# Altium PCB PCB GYRO REPETER.PcbDoc
Units mm, origin at the board's own origin, x right, y up, seen from the top; angles counter-clockwise.
Board outline 123.44 x 88.01 mm, 2 copper layers (Top Layer, Bottom Layer); 64 components, 61 nets, 238 pads, 15 vias.
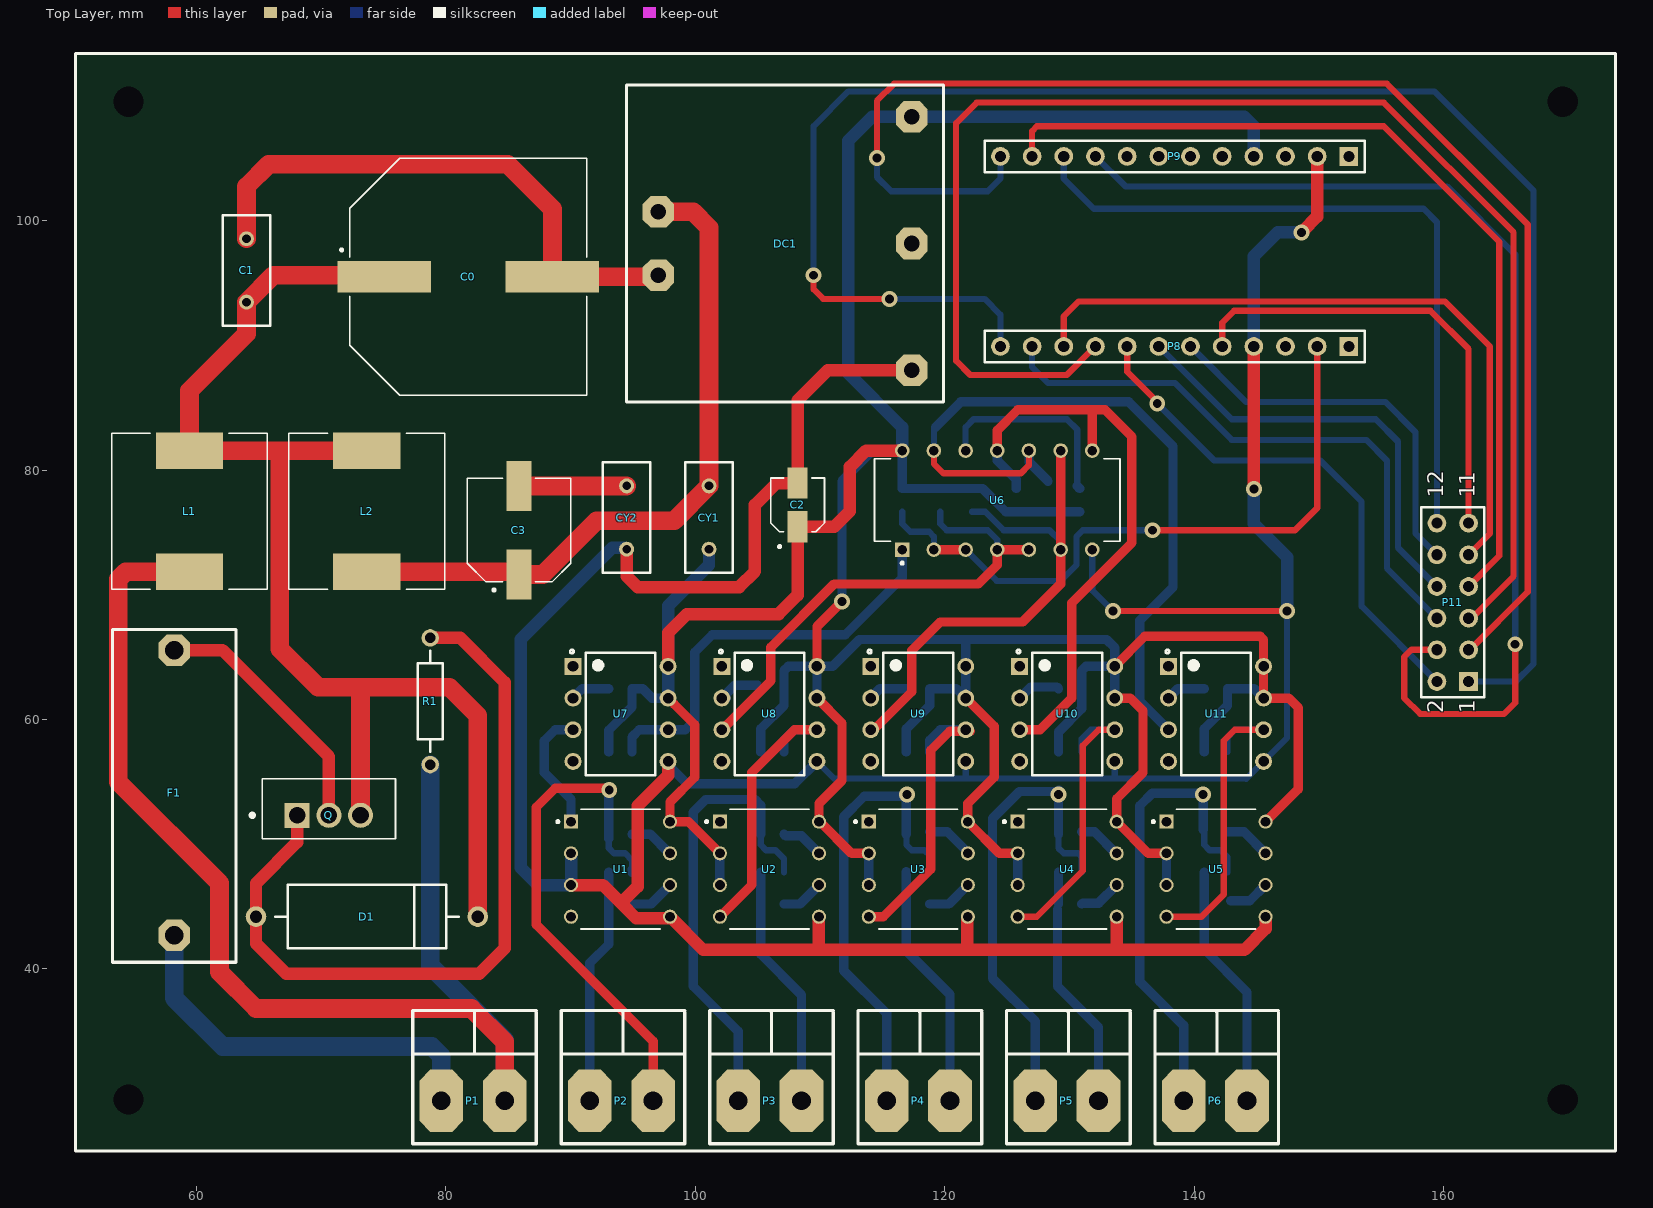
[diagram p0: Top Layer view]
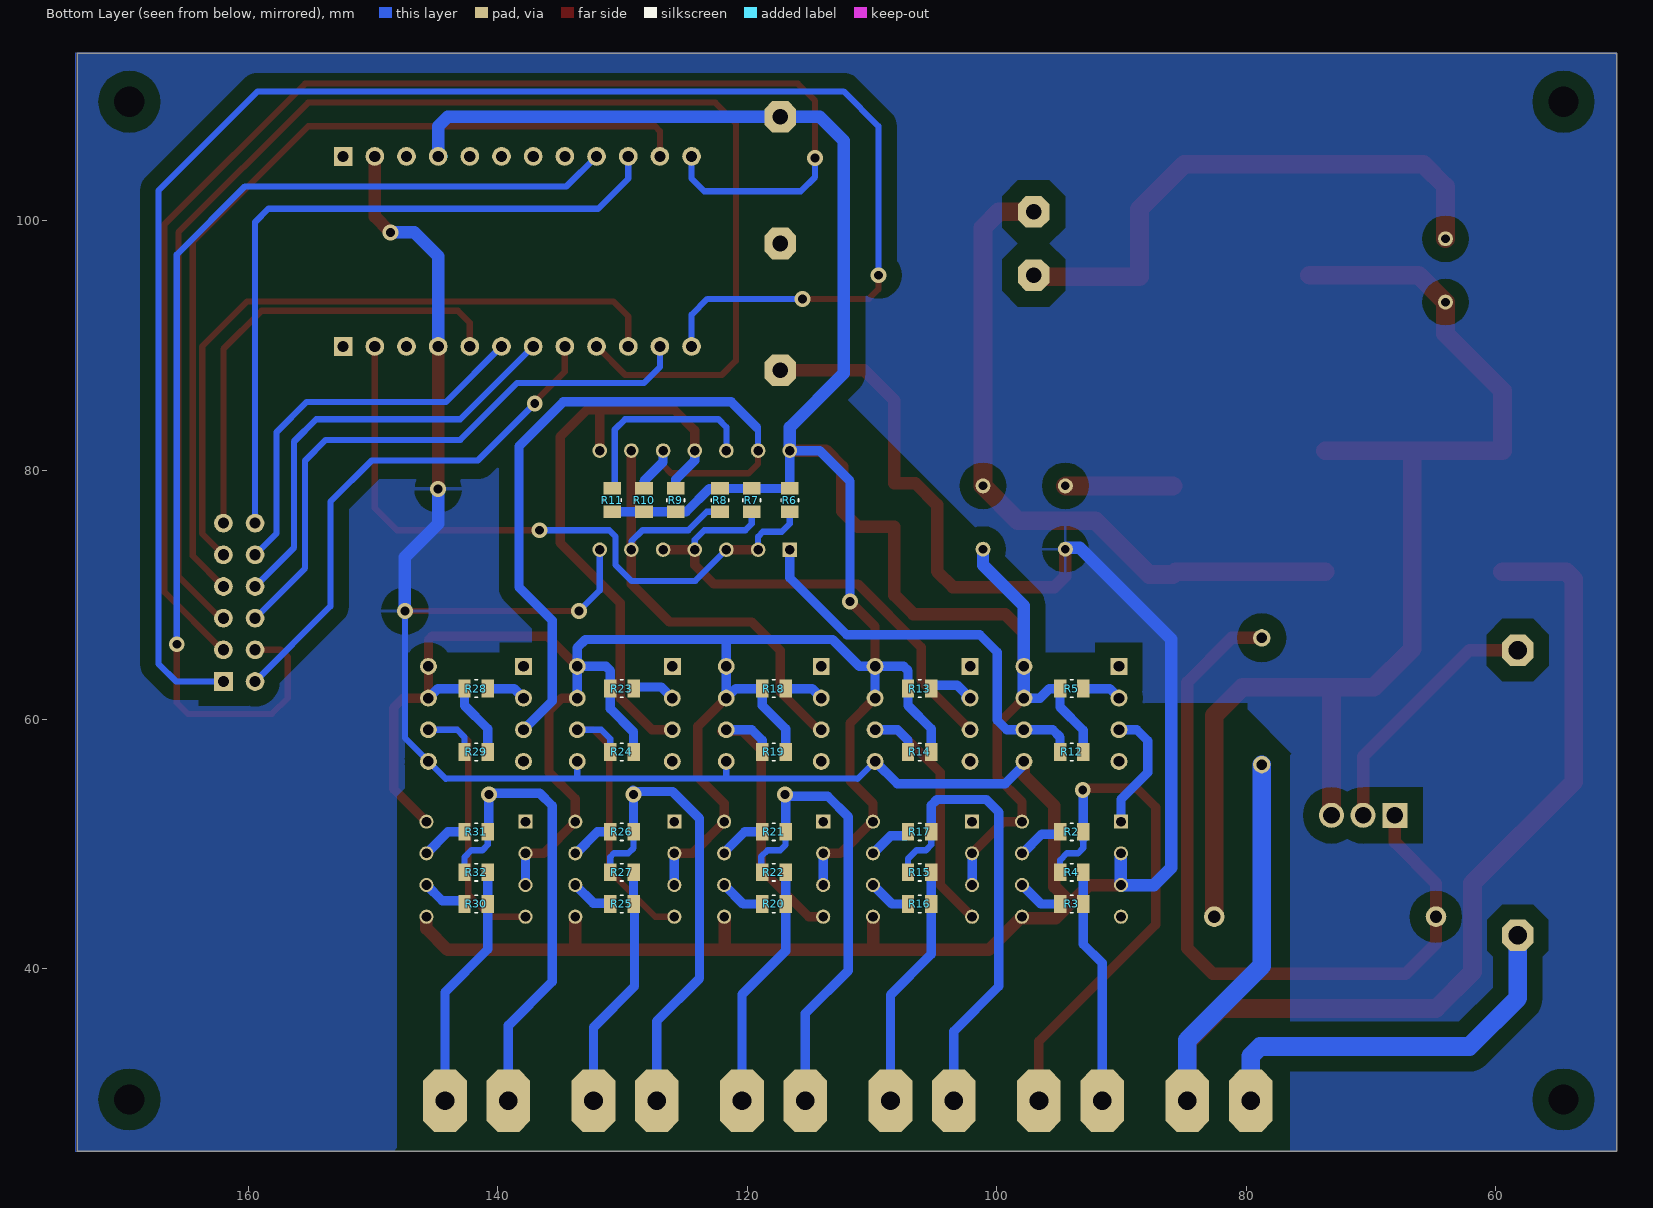
[diagram p1: Bottom Layer view, seen from below]

## Layer stack, top to bottom
Top Layer: signal copper 0.0356
Dielectric: dielectric 0.32, FR-4, Dk 4.8
Bottom Layer: signal copper 0.0356

## Board outline
50.292,25.4 173.736,25.4 173.736,113.411 50.292,113.411

## Design rules (kind name [scope] priority, off if disabled: settings)
Clearance Clearance_1 [All] p1: gap=0.254
Clearance [All] p2: gap=0.254
PolygonConnect [All] p1: connectstyle=Relief reliefconductorwidth=0.254 reliefentries=4 polygonreliefangle="90 Angle"
RoomDefinition "PCB GYRO REPETER" [InComponentClass('PCB GYRO REPETER')] p1: confinementstyle=ConfineIn formatcopy=TRUE lockcomponents=FALSE outline 336.931,5.461 0,5.461 0,179.324 336.931,179.324
RoutingVias [All] p1: holewidth=0.711 width=1.27 viastyle="Through Hole" minholewidth=0.711 minwidth=1.27 maxholewidth=0.711 maxwidth=1.27
SilkToSilkClearance [All] p1: silktosilkclearance=0.104
SilkscreenOverComponentPads [All] p1: minsilkscreentomaskgap=0.104
SolderMaskExpansion [All] p1: expansion=0.102
Width [All] p1: maxlimit=2 minlimit=0.254 preferedwidth=1
26 further rules are at their usual default settings.

## Components (designator, comment, footprint, x,y, rotation, side; value= is the part's Value field where it differs from the comment)
C0 "EEVTG1V102M" CAP_EEVTG1V102M 81.788,95.504 r0 top
C1 "Cap" RAD-0.2 64.008,96.012 r270 top
C2 "EEEFP1C100AR" CAP_EEEFP1C100AR 108.204,77.216 r90 top
C3 "EEEFT1V331AL" CAP_EEEFT1V331AL 85.852,75.184 r90 top
CY1 "Cap" RAD-0.2 101.092,76.2 r90 top
CY2 "Cap" RAD-0.2 94.488,76.2 r90 top
D1 "D Zener" DIODE-0.7 73.66,44.196 r0 top
DC1 "MORNSUN DC DC" "DC DC MORNSUN" 99.06,98.552 r0 top
F1 "FUSE-HOLDER" Fuse-Holder 46.228,50.8 r0 top
L1 "330uH" IND_SRR1240-101M 59.436,76.708 r90 top
L2 "SRR1240-101M" IND_SRR1240-101M 73.66,76.708 r90 top
P1 "PWR" Terminal-blok 6.6,97.5 r0 top
P2 "INPUT" Terminal-blok 18.505,97.5 r0 top
P3 "OUT-1" Terminal-blok 30.409,97.5 r0 top
P4 "OUT-2" Terminal-blok 42.314,97.5 r0 top
P5 "OUT-3" Terminal-blok 54.22,97.5 r0 top
P6 "OUT-4" Terminal-blok 66.124,97.5 r0 top
P8 "Header 12" HDR1X12 152.4,89.916 r180 top
P9 "Header 12" HDR1X12 152.4,105.156 r180 top
P11 "Header 6X2" HDR2X6 162,63.05 r90 top
Q "FQP47P06" TO254P1067X483X2286-3 68.072,52.324 r0 top
R1 "Res2" AXIAL-0.4 78.74,61.468 r90 top
R2 "1623401-1" RESC2012X65N 93.98,51 r0 bottom
R3 "1623401-1" RESC2012X65N 93.98,45.212 r0 bottom
R4 "1623401-1" RESC2012X65N 93.98,47.752 r180 bottom
R5 "1623401-1" RESC2012X65N 93.98,62.484 r0 bottom
R6 "1623401-1" RESC2012X65N 116.586,77.597 r90 bottom
R7 "1623401-1" RESC2012X65N 119.634,77.597 r90 bottom
R8 "1623401-1" RESC2012X65N 122.174,77.597 r90 bottom
R9 "1623401-1" RESC2012X65N 125.73,77.597 r270 bottom
R10 "1623401-1" RESC2012X65N 128.27,77.597 r270 bottom
R11 "1623401-1" RESC2012X65N 130.81,77.597 r270 bottom
R12 "1623401-1" RESC2012X65N 93.98,57.404 r180 bottom
R13 "1623401-1" RESC2012X65N 106.172,62.484 r0 bottom
R14 "1623401-1" RESC2012X65N 106.172,57.404 r180 bottom
R15 "1623401-1" RESC2012X65N 106.172,47.752 r0 bottom
R16 "1623401-1" RESC2012X65N 106.172,45.212 r180 bottom
R17 "1623401-1" RESC2012X65N 106.172,51 r180 bottom
R18 "1623401-1" RESC2012X65N 117.856,62.484 r0 bottom
R19 "1623401-1" RESC2012X65N 117.856,57.404 r180 bottom
R20 "1623401-1" RESC2012X65N 117.856,45.212 r180 bottom
R21 "1623401-1" RESC2012X65N 117.856,51 r180 bottom
R22 "1623401-1" RESC2012X65N 117.856,47.752 r0 bottom
R23 "1623401-1" RESC2012X65N 130.048,62.484 r0 bottom
R24 "1623401-1" RESC2012X65N 130.048,57.404 r180 bottom
R25 "1623401-1" RESC2012X65N 130.048,45.212 r180 bottom
R26 "1623401-1" RESC2012X65N 130.048,51 r180 bottom
R27 "1623401-1" RESC2012X65N 130.048,47.752 r0 bottom
R28 "1623401-1" RESC2012X65N 141.732,62.484 r180 bottom
R29 "1623401-1" RESC2012X65N 141.732,57.404 r0 bottom
R30 "1623401-1" RESC2012X65N 141.732,45.212 r0 bottom
R31 "1623401-1" RESC2012X65N 141.732,51 r0 bottom
R32 "1623401-1" RESC2012X65N 141.732,47.752 r180 bottom
U1 "SN75176BP" DIP794W45P254L959H508Q8 94,48 r0 top
U2 "SN75176BP" DIP794W45P254L959H508Q8 105.938,48 r0 top
U3 "SN75176BP" DIP794W45P254L959H508Q8 117.874,48 r0 top
U4 "SN75176BP" DIP794W45P254L959H508Q8 129.812,48 r0 top
U5 "SN75176BP" DIP794W45P254L959H508Q8 141.75,48 r0 top
U6 "SN7407N" DIP794W45P254L1969H508Q14 124.206,77.597 r90 top
U7 "6N137" DIP762W50P254L977H451Q8 94,60.452 r0 top
U8 "6N137" DIP762W50P254L977H451Q8 105.938,60.452 r0 top
U9 "6N137" DIP762W50P254L977H451Q8 117.874,60.452 r0 top
U10 "6N137" DIP762W50P254L977H451Q8 129.812,60.452 r0 top
U11 "6N137" DIP762W50P254L977H451Q8 141.75,60.452 r0 top

## Footprints (in the part's own frame and the unit in brackets; to place one, negate y for a bottom-side part, rotate by r counter-clockwise, add the part's x,y. Pads: shape width x height; smd on the part's side, far side on the other; paste and mask are expansions set on the pad)
AXIAL-0.4 [mm] "Axial Device, Thru-Hole; 2 Leads; 0.4 in Pin Spacing"
  round 1.4 hole 0.85: 1(-5.08,0) 2(5.08,0)
  silkscreen extent -4.06,-1.02 4.06,1.02
CAP_EEEFP1C100AR [mm]
  rect 2.5x1.6 smd: 1(-1.75,0) 2(1.75,0)
  silkscreen extent -3.45,-2.15 2.15,2.15, body extent -2.5,-2.15 2.5,2.15, height 5.3
CAP_EEEFT1V331AL [mm]
  rect 4x2 smd: 1(-3.55,0) 2(3.55,0)
  silkscreen extent -4.9,-4.15 4.15,4.15, body extent -4.85,-4.15 4.85,4.15, height 10.2
CAP_EEVTG1V102M [mm]
  rect 7.5x2.5 smd: 1(-6.75,0) 2(6.75,0)
  silkscreen extent -10.25,-9.5 9.5,9.5, body extent -10.2,-9.5 10.2,9.5, height 15
"DC DC MORNSUN" [mil]
  oct 100x100 hole 49.21: 1(-80,-115) 2(-80,85) 3(720,385) 4(720,-15) 5(720,-415)
  silkscreen extent -180,-515 820,485
DIODE-0.7 [mm] "Diode, Thru-Hole; 2 Leads; 0.7 in Pin Spacing"
  round 1.65 hole 1: 1(-8.89,0) 2(8.89,0)
  silkscreen extent -7.37,-2.54 7.37,2.54
DIP762W50P254L977H451Q8 [mm]
  rect 1.35x1.35 hole 0.85: 1(-3.81,3.81)
  round 1.35 hole 0.85: 2(-3.81,1.27) 3(-3.81,-1.27) 4(-3.81,-3.81) 5(3.81,-3.81) 6(3.81,-1.27) 7(3.81,1.27) 8(3.81,3.81)
  silkscreen extent -4.04,-4.9 2.8,5.14
DIP794W45P254L959H508Q8 [mm]
  rect 1.13x1.13 hole 0.78: 1(-3.97,3.81)
  round 1.13 hole 0.78: 2(-3.97,1.27) 3(-3.97,-1.27) 4(-3.97,-3.81) 5(3.97,-3.81) 6(3.97,-1.27) 7(3.97,1.27) 8(3.97,3.81)
  silkscreen extent -5.13,-4.79 3.17,4.79, body extent -4.79,-5.46 4.79,5.46, height 5.08
DIP794W45P254L1969H508Q14 [mm]
  rect 1.17x1.17 hole 0.77: 1(-3.97,7.62)
  round 1.17 hole 0.77: 2(-3.97,5.08) 3(-3.97,2.54) 4(-3.97,0) 5(-3.97,-2.54) 6(-3.97,-5.08) 7(-3.97,-7.62) 8(3.97,-7.62) 9(3.97,-5.08) 10(3.97,-2.54) 11(3.97,0) 12(3.97,2.54) 13(3.97,5.08) 14(3.97,7.62)
  silkscreen extent -5.15,-9.84 3.3,9.84
Fuse-Holder [mm]
  oct 2.5x2.5 hole 1.5: 1(11.99,14.764) 2(11.99,-8.096)
  silkscreen extent 7.04,-10.26 16.94,16.41
HDR1X12 [mm] "Connector; Header; 12 Position"
  rect 1.5x1.5 hole 0.9: 1(0,0)
  round 1.5 hole 0.9: 2(2.54,0) 3(5.08,0) 4(7.62,0) 5(10.16,0) 6(12.7,0) 7(15.24,0) 8(17.78,0) 9(20.32,0) 10(22.86,0) 11(25.4,0) 12(27.94,0)
  silkscreen extent -1.27,-1.27 29.21,1.27
HDR2X6 [mm] "Connector; Header; 6x2 Position"
  rect 1.5x1.5 hole 0.9: 1(0,0)
  round 1.5 hole 0.9: 2(0,2.54) 3(2.54,0) 4(2.54,2.54) 5(5.08,0) 6(5.08,2.54) 7(7.62,0) 8(7.62,2.54) 9(10.16,0) 10(10.16,2.54) 11(12.7,0) 12(12.7,2.54)
  silkscreen extent -1.27,-1.27 13.97,3.81
IND_SRR1240-101M [mm]
  rect 2.9x5.4 smd: 1(-4.85,0) 2(4.85,0)
  silkscreen extent -6.25,-6.25 6.25,6.25
RAD-0.2 [mm] "Radial Cap, Thru-Hole; 2 Leads; 0.2 in Pin Spacing"
  round 1.2 hole 0.7: 1(-2.54,0) 2(2.54,0)
  silkscreen extent -4.44,-1.91 4.44,1.91
RESC2012X65N [mm]
  rect 1x1.42 smd: 1(-0.935,0) 2(0.935,0)
  silkscreen extent -0.12,-0.7 0.12,0.7
Terminal-blok [mm]
  oct 3.5x5 hole 1.5: 1(73.025,-68.072) 2(78.105,-68.072)
  silkscreen extent 70.74,-71.51 80.64,-60.83
TO254P1067X483X2286-3 [mm]
  rect 2.01x2.01 hole 1.34: 1(0,0)
  round 2.01 hole 1.34: 2(2.54,0) 3(5.08,0)
  silkscreen extent -3.74,-1.89 7.88,2.95

## Part data
C0: "Cap Aluminum Lytic 1000uF 35V 20% (18 X 16.5mm) SMD 0.075 Ohm 1300mA 2000h 125C Automotive T/R"
C1 CY1 CY2: "Capacitor"
C2: "10µF 16V Aluminum Electrolytic Capacitors Radial, Can - SMD 850mOhm @ 100kHz 2000 Hrs @ 105°C"
C3: "CAP ALUM 330UF 20% 35V SMD"
D1: "Zener Diode"
DC1: library part "DC-DC MORNSUN"
L1: library part SRR1240-101M, "100µH Shielded Wirewound Inductor 1.25A 300mOhm Max Nonstandard"
L2: "100µH Shielded Wirewound Inductor 1.25A 300mOhm Max Nonstandard"
P1 P2 P3 P4 P5 P6: library part "Header 2", "Header, 2-Pin"
P8 P9: "Header, 12-Pin"
P11: "Header, 6-Pin, Dual row"
Q: "P-Channel 60V 47A _Tc_ 160W _Tc_ Through Hole TO-220-3"
R1: "Resistor"
R2 R3 R4 R5 R6 R7 R8 R9 R10 R11 R12 R13 R14 R15 R16 R17 R18 R19 R20 R21 R22 R23 R24 R25 R26 R27 R28 R29 R30 R31 R32: library part CRG0805ZR, "Res Thick Film 0805 0 Ohm Molded SMD SMD T/R"
U1 U2 U3 U4 U5: "Differential bus transceiver 8-PDIP 0 to 70"
U6: "Búferes / controladores hexagonales con salidas de alto voltaje de colector abierto 14-PDIP 0 a 70"
U7 U8 U9 U10 U11: "Optoaislador de salida lógica 10Mbps Open Collector 5000Vrms 1 Channel 5kV / µs CMTI 8-DIP"

## Free pads (board coordinates)
  round 1.524 hole 2.44: 0(54.545,29.535) 0(54.545,109.535) 0(169.54,29.535) 0(169.54,109.535)

## Via types
v1: diameter 1.27, hole 0.711, Top Layer to Bottom Layer, 15 vias

## Nets (pads, with @x,y where several pads share a name; then routed paths per layer and width w, separated by ;. In a path a pad name is that pad's centre, name@x,y a point inside that pad or via, vN(x,y) a via of type N, cw(c..) or ccw(c..) an arc to the next point about the centre after c; other vN are vias at no path point)
-VIN: L1.1 P1.2 R1.1 | length 101.2
  Top Layer w1.5: L1.1 54.332,71.858 53.721,71.247 53.721,54.991 61.849,46.863 61.849,39.751 64.77,36.83 82.042,36.83 84.705,34.167 P1.2@84.705,28.928
  Bottom Layer w1.5: R1.1 78.74,40.259 84.705,34.294 P1.2@84.705,28.928
A: P9.9 P11.4 | length 88.8
  Top Layer w0.5: P11.4 157.411,65.59 156.845,65.024 156.845,61.722 158.115,60.452 164.846,60.452 165.735,61.341 v1(165.735,66.04)
  Bottom Layer w0.5: P9.9 134.493,102.743 160.274,102.743 165.735,97.282 v1(165.735,66.04)
B: P9.10 P11.12 | length 57.3
  Bottom Layer w0.5: P9.10 129.54,103.378 131.953,100.965 158.392,100.965 159.46,99.897 P11.12
C: P9.11 P11.7 | length 72.1
  Top Layer w0.5: P9.11 127,107.188 127.381,107.569 155.194,107.569 164.465,98.298 164.465,73.135 P11.7
D: P9.12 P11.3 | length 112.3
  Top Layer w0.5: v1(114.554,105.029) 114.554,109.601 115.951,110.998 155.448,110.998 166.751,99.695 166.751,70.231 162.11,65.59 P11.3
  Bottom Layer w0.5: v1(114.554,105.029) 114.554,103.505 115.697,102.362 123.444,102.362 124.46,103.378 P9.12
DATA-IN: R12.1 U6.1 U7.6 | length 33.6
  Bottom Layer w0.75: R12.1 94.915,58.593 95.504,59.182 U7.6 99.187,59.182 99.949,59.944 99.949,65.405 101.346,66.802 112.014,66.802 116.586,71.374 U6.1
DATA_OUT1: P8.2 R6.1 U6.2 U6.3 | length 53.5
  Top Layer w0.5: v1(136.652,75.184) 148.082,75.184 149.86,76.962 P8.2
  Top Layer w0.75: U6.2 U6.3
  Bottom Layer w0.5: R6.1 116.586,75.692 117.221,75.057 118.745,75.057 119.126,74.676 U6.2 ; U6.3 124.173,71.12 129.286,71.12 130.556,72.39 130.556,74.676 131.064,75.184 v1(136.652,75.184)
DATA_OUT2: R7.1 U6.4 U6.5 U8.3 | length 39.8
  Top Layer w0.75: U8.3 106.045,63.099 106.045,65.786 111.125,70.866 122.682,70.866 124.206,72.39 U6.4 U6.5
  Bottom Layer w0.5: R7.1 119.634,75.692 120.142,75.184 123.444,75.184 124.206,74.422 U6.4
DATA_OUT3: R8.1 U6.6 U6.9 U9.3 | length 41.5
  Top Layer w0.75: U9.3 114.3,59.182 117.348,62.23 117.348,65.532 119.634,67.818 126.238,67.818 129.286,70.866 U6.6 U6.9
  Bottom Layer w0.5: R8.1 123.236,76.662 124.714,75.184 128.397,75.184 129.286,74.295 U6.6
DATA_OUT4: R9.1 U6.8 U6.11 U10.3 | length 49.2
  Top Layer w0.75: U6.11 124.206,83.185 125.857,84.836 131.953,84.836 ; U10.3 127.635,59.182 130.175,61.722 130.175,69.342 135.001,74.168 135.001,82.677 132.842,84.836 131.953,84.836 ; U6.8 131.826,84.709 131.953,84.836
  Bottom Layer w0.75: U6.11 124.206,80.772 125.73,79.248 R9.1
DATA_OUT5: R10.1 U6.10 U6.13 U11.3 | length 61.4
  Top Layer w0.5: U6.13 119.126,80.518 119.888,79.756 126.111,79.756 126.746,80.391 U6.10
  Bottom Layer w0.5: U6.13 119.126,83.312
  Bottom Layer w0.75: 119.253,83.439 121.285,85.471 134.747,85.471 138.303,81.915 138.303,70.612 135.636,67.945 135.636,61.486 U11.3 ; U6.10 126.746,80.645 128.27,79.121
DATA_OUT6: R11.1 U6.12 | length 16.2
  Bottom Layer w0.5: U6.12 121.666,83.439 122.301,84.074 129.794,84.074 130.612,83.256 R11.1@130.612,78.73
  Bottom Layer w0.75: R11.1@130.612,78.73 R11.1
DIG1: P8.8 P11.2 | length 42
  Top Layer w0.5: P8.8 134.62,87.884 v1@137.033,85.471
  Bottom Layer w0.5: v1(137.033,85.344) 141.605,80.772 150.114,80.772 153.416,77.47 153.416,69.094 P11.2
DIG2: P8.7 P11.8 | length 35.3
  Bottom Layer w0.5: P8.7 143.002,84.074 154.559,84.074 156.337,82.296 156.337,73.787 159.454,70.67 P11.8
DIG3: P8.6 P11.10 | length 31.4
  Bottom Layer w0.5: P8.6 144.145,85.471 155.321,85.471 157.734,83.058 157.734,74.936 P11.10
DIG4: P8.5 P11.11 | length 37.6
  Top Layer w0.5: P8.5 142.24,91.821 143.192,92.773 158.94,92.773 162,89.714 162,84.455 ; P11.11 162,84.455 ; 162,84.761 162,84.455
DP: P8.9 P11.5 | length 113.9
  Top Layer w0.5: P8.9 129.794,87.63 122.047,87.63 120.904,88.773 120.904,107.823 122.555,109.474 155.194,109.474 165.608,99.06 165.608,71.501 162.237,68.13 P11.5
E: P8.12 P11.1 | length 137.4
  Top Layer w0.5: v1(109.474,95.631) 109.474,94.488 110.236,93.726 v1(115.57,93.726)
  Bottom Layer w0.5: v1(109.474,95.631) 109.474,107.569 112.268,110.363 159.258,110.363 167.195,102.425 167.195,64.453 165.793,63.05 P11.1 ; v1(115.57,93.726) 123.19,93.726 124.46,92.456 P8.12
F: P8.11 P11.6 | length 47.5
  Bottom Layer w0.5: P8.11 127,88.265 128.27,86.995 138.43,86.995 143.002,82.423 153.797,82.423 155.448,80.772 155.448,72.142 P11.6
G: P8.10 P11.9 | length 56
  Top Layer w0.5: P8.10 129.54,92.329 130.738,93.527 160.092,93.527 163.703,89.916 163.703,74.913 P11.9
GND: C2.2 CY2.1 DC1.5 P8.4 P9.2 U1.2 U1.3 U1.5 U2.5 U3.5 U4.5 U5.5 U6.7 U7.5 U8.5 U9.5 U10.5 U11.5 | length 282.6
  Top Layer w0.5: v1(133.477,68.707) v1(147.447,68.707)
  Top Layer w1: U1.3 92.589,46.73 94.043,45.276 ; CY2.1 94.488,71.501 95.377,70.612 103.505,70.612 104.775,71.882 104.775,77.216 106.525,78.966 C2.2 108.204,85.598 110.617,88.011 DC1.5 ; U7.5 97.81,55.519 95.377,53.086 95.377,46.609 94.043,45.276 ; U1.5@97.849,44.069 95.25,44.069 94.043,45.276 ; U1.5 100.631,41.529 144.018,41.529 145.72,43.231 U5.5 ; 109.908,41.529 U2.5@109.908,43.995 ; 121.787,41.529 U3.5@121.787,44.19 ; 133.782,41.529 U4.5 ; v1@144.78,78.74 P8.4 ; v1@148.717,99.187 149.86,100.33 P9.2
  Bottom Layer w0.5: U8.5 111.145,55.245 ; 111.179,55.279 133.622,55.279 ; 121.684,55.449 U9.5 ; U6.7 131.826,70.358 v1(133.477,68.707) ; U10.5 133.622,55.279 ; 144.129,55.279 133.622,55.279 ; 144.163,55.245 U11.5 147.447,58.529 v1(147.447,68.707)
  Bottom Layer w0.75: U7.5@97.81,56.495 U7.5 97.81,56.368 99.314,54.864 107.97,54.864 U8.5
  Bottom Layer w1: U1.2 U1.3 87.382,46.73 85.979,48.133 85.979,66.421 93.345,73.787 CY2.1@94.361,73.787 ; v1(144.78,78.486) 144.78,75.692 147.447,73.025 v1(147.447,68.707) ; P8.4 144.78,97.155 146.685,99.06 v1(148.59,99.06)
NetC0_1: C0.1 C1.2 D1.2 L1.2 L2.2 Q.3 | length 100.2
  Top Layer w1.5: Q.3 73.152,62.588 ; L2.2 66.675,81.558 ; C0.1@74.911,95.631 66.167,95.631 C1.2 64.008,90.932 59.436,86.36 L1.2 66.675,81.558 ; D1.2 82.55,60.325 80.287,62.588 73.152,62.588 ; 66.675,81.558 66.675,65.659 69.746,62.588 73.152,62.588
NetC0_2: C0.2 C1.1 DC1.1 | length 44.7
  Top Layer w1.5: C1.1 64.008,102.743 65.786,104.521 84.963,104.521 88.538,100.946 C0.2 DC1.1@96.901,95.504
NetC3_1: C3.1 CY1.2 DC1.2 L2.1 | length 54.4
  Top Layer w1.5: L2.1 C3.1@85.628,71.858 ; C3.1 87.763,71.634 92.075,75.946 98.298,75.946 CY1.2 101.092,99.441 99.822,100.711 DC1.2@98.044,100.711
NetC3_2: C3.2 CY2.2 | length 8.6
  Top Layer w1.5: C3.2 CY2.2@94.482,78.734
NetD1_1: D1.1 Q.1 R1.2 | length 62.2
  Top Layer w1: Q.1 68.072,50.165 64.77,46.863 D1.1 64.77,42.037 67.183,39.624 82.677,39.624 84.709,41.656 84.709,62.992 81.153,66.548 R1.2
NetF1_1: F1.1 Q.2 | length 20.6
  Top Layer w1: F1.1 62.071,65.564 70.612,57.023 Q.2
NetF1_2: F1.2 P1.1 | length 32.5
  Bottom Layer w1.5: F1.2 58.218,37.667 62.103,33.782 78.867,33.782 79.625,33.024 P1.1@79.625,28.928
NetP2_1: P2.1 R3.1 R4.2 | length 19.5
  Bottom Layer w0.75: P2.1@91.53,28.928 91.53,40.476 93.045,41.991 R3.1 R4.2
NetP2_2: P2.2 R2.1 R4.1 | length 42.3
  Top Layer w0.75: v1@92.964,54.483 88.773,54.483 87.249,52.959 87.249,43.561 96.61,34.2 P2.2@96.61,28.928 ; v1(93.091,54.356) v1@93.345,54.356
  Bottom Layer w0.5: R2.1@93.045,50.465 93.045,49.703 93.472,49.276 94.361,49.276 94.915,48.722 R4.1
  Bottom Layer w0.75: R2.1@93.045,50.465 93.045,50.8 v1@93.045,54.056 ; R4.1 R4.1@94.915,47.982
NetP3_1: P3.1 R15.2 R17.2 | length 37.8
  Bottom Layer w0.5: R17.2@105.237,50.8 105.237,49.957 105.664,49.53 106.426,49.53 107.107,48.849 R15.2
  Bottom Layer w0.75: P3.1@103.434,28.928 103.434,34.996 99.822,38.608 99.822,52.578 100.838,53.594 104.775,53.594 105.237,53.132 R17.2@105.237,50.8
NetP3_2: P3.2 R15.1 R16.2 | length 20.2
  Bottom Layer w0.75: R15.1 R16.2 105.237,41.194 108.514,37.917 P3.2@108.514,28.928
NetP4_1: P4.1 R21.2 R22.2 | length 37.9
  Bottom Layer w0.5: R21.2 116.921,49.957 117.348,49.53 118.364,49.53 118.872,49.022 118.872,48.133 R22.2@118.745,48.006
  Bottom Layer w0.75: P4.1@115.339,28.928 115.339,36.426 111.887,39.878 111.887,52.197 113.538,53.848 v1@116.459,53.848 ; R21.2@116.921,50.8 R21.2 v1@116.921,54.056 ; v1@116.967,53.848 v1@116.967,54.102
  other v1: 116.967,54
NetP4_2: P4.2 R20.2 R22.1 | length 20.3
  Bottom Layer w0.75: R22.1@116.921,47.798 R22.1 R20.2 116.921,41.448 120.419,37.95 P4.2@120.419,28.928
NetP5_1: P5.1 R26.2 R27.2 | length 38.7
  Bottom Layer w0.5: R26.2 129.113,49.703 129.54,49.276 130.683,49.276 130.983,48.976 R27.2
  Bottom Layer w0.75: P5.1@127.245,28.928 127.245,35.823 123.825,39.243 123.825,52.07 125.984,54.229 v1@128.778,54.229 ; R26.2@129.113,50.8 R26.2 129.113,54.31 v1@129.159,54.356
  other v1: 129.113,54
NetP5_2: P5.2 R25.2 R27.1 | length 19.8
  Bottom Layer w0.75: R25.2@129.032,44.785 129.032,38.608 132.325,35.315 P5.2@132.325,28.928 ; R25.2 R27.1
NetP6_1: P6.1 R31.1 R32.1 | length 38.6
  Bottom Layer w0.5: R31.1 140.797,49.957 141.224,49.53 142.113,49.53 142.667,48.976 R32.1
  Bottom Layer w0.75: P6.1@139.149,28.928 139.149,35.476 135.636,38.989 135.636,53.086 136.652,54.102 140.716,54.102 R31.1@140.716,51.173
  other v1: 140.716,54
NetP6_2: P6.2 R30.1 R32.2 | length 20.2
  Bottom Layer w0.75: R32.2 R30.1 140.797,41.575 144.229,38.143 P6.2@144.229,28.928
NetR2_2: R2.2 U1.7 | length 3.7
  Bottom Layer w0.75: R2.2@94.915,50.8 96.393,50.8 97.923,49.27 U1.7
NetR3_2: R3.2 U1.6 | length 3.7
  Bottom Layer w0.75: R3.2 96.452,45.212 U1.6
NetR5_1: R5.1 U7.2 | length 3.2
  Bottom Layer w0.75: U7.2 90.19,61.742 90.932,62.484 R5.1
NetR13_1: R13.1 U8.2 | length 3.6
  Bottom Layer w0.75: U8.2@102.489,61.722 U8.2 103.144,62.738 R13.1@104.983,62.738
NetR16_1: R16.1 U2.6 | length 3.4
  Bottom Layer w0.75: R16.1 108.39,45.212 U2.6
NetR17_1: R17.1 U2.7 | length 3.4
  Bottom Layer w0.75: R17.1@107.107,50.8 107.234,50.673 108.505,50.673 U2.7
NetR18_1: R18.1 U9.2 | length 3.2
  Bottom Layer w0.75: U9.2 114.064,61.74 114.808,62.484 R18.1
NetR20_1: R20.1 U3.6 | length 3.7
  Bottom Layer w0.75: R20.1 120.326,45.212 U3.6
NetR21_1: R21.1 U3.7 | length 3.8
  Bottom Layer w0.75: R21.1 120.196,51 121.844,49.352 U3.7
NetR23_1: R23.1 U10.2 | length 3.5
  Bottom Layer w0.75: U10.2 126.891,62.611 128.986,62.611 R23.1
NetR25_1: R25.1 U4.6 | length 3.4
  Bottom Layer w0.75: R25.1 131.053,45.282 132.334,45.282 U4.6
NetR26_1: R26.1 U4.7 | length 3.5
  Bottom Layer w0.75: R26.1 132.007,51 U4.7@133.737,49.27
NetR28_2: R28.2 U11.2 | length 3.2
  Bottom Layer w0.75: U11.2 138.702,62.484 R28.2
NetR30_2: R30.2 U5.6 | length 3.3
  Bottom Layer w0.75: R30.2@142.921,45.466 144.456,45.466 U5.6
NetR31_2: R31.2 U5.7 | length 3.8
  Bottom Layer w0.75: R31.2 143.99,51 U5.7
NetU1_1: U1.1 U7.3 | length 10
  Bottom Layer w0.75: U1.1 90.03,53.607 87.884,55.753 87.884,58.293 88.773,59.182 U7.3
RST: 
TX-D: P8.1
TX-OUT1: R14.1 U2.4 U8.6 | length 23.2
  Top Layer w0.75: U2.4 104.521,46.743 104.521,55.753 107.95,59.182 U8.6
  Bottom Layer w0.75: R14.1 107.107,58.339 107.95,59.182 U8.6
TX-OUT2: R19.1 U3.4 U9.6 | length 24.1
  Top Layer w0.75: U3.4 115.056,44.19 118.872,48.006 118.872,57.531 120.396,59.055 U9.6@122.047,59.055
  Bottom Layer w0.75: R19.1 118.791,58.339 119.634,59.182 U9.6
TX-OUT3: R24.1 U4.4 U10.6 | length 23.9
  Top Layer w0.5: U4.4 127.375,44.19 131.064,47.879 131.064,57.912 132.334,59.182 U10.6
  Bottom Layer w0.5: R24.1 130.983,58.466 131.699,59.182 U10.6
TX-OUT4: R29.2 U5.4 U11.6 | length 25.5
  Top Layer w0.5: U5.4 140.583,44.19 142.367,45.974 142.367,58.293 143.256,59.182 U11.6
  Bottom Layer w0.5: R29.2 142.667,58.593 143.256,59.182 U11.6
VCC: C2.1 CY1.1 DC1.3 P9.4 R5.2 R6.2 R7.2 R8.2 R9.2 R10.2 R11.2 R12.2 R13.2 R14.2 R18.2 R19.2 R23.2 R24.2 R28.1 R29.1 U1.8 U2.2 U2.3 U2.8 U3.2 U3.3 U3.8 U4.2 U4.3 U4.8 U5.2 U5.3 U5.8 U6.14 U7.7 U7.8 U8.7 U8.8 U9.7 U9.8 U10.7 U10.8 U11.7 U11.8 | length 339.3
  Top Layer w0.75: 98.308,61.224 99.949,59.583 99.949,55.372 97.97,53.393 U1.8 99.447,51.81 U2.2@101.968,49.289 ; U8.7 111.76,59.71 111.76,55.118 109.908,53.266 U2.8 109.988,51.81 112.528,49.27 U3.2 ; U8.8 109.748,67.457 v1(111.76,69.469) ; U9.7 123.952,59.454 123.952,55.372 121.844,53.264 U3.8 124.384,49.27 U4.2 ; U10.8 136.035,66.675 145.288,66.675 145.56,66.403 U11.8 U11.7 147.574,61.722 148.336,60.96 148.336,54.426 U5.8 ; U10.7@134.239,61.722 134.874,61.722 135.89,60.706 135.89,55.753 133.782,53.645 U4.8 136.322,49.27 U5.2
  Top Layer w1: U7.8 97.81,66.949 99.314,68.453 106.68,68.453 108.204,69.977 C2.1 111.153,75.466 112.395,76.708 112.395,80.264 113.698,81.567 U6.14
  Bottom Layer w0.75: R12.2 93.045,59.136 94.915,61.006 R5.2 95.758,62.484 96.52,61.722 U7.7 ; U2.3 U2.2 ; R14.2 105.237,59.263 107.107,61.133 R13.2 107.107,63.927 107.442,64.262 U8.8 ; U8.7 U8.8 ; v1(111.76,69.469) 111.76,79.121 114.206,81.567 U6.14 R6.2 R7.2 R8.2 123.017,78.532 124.887,76.662 R9.2 R10.2 R11.2 ; U3.3 U3.2 ; R19.2 116.921,59.263 118.791,61.133 R18.2 120.922,62.484 U9.7 U9.8 121.684,66.167 ; U4.3 U4.2 ; R24.2 129.113,59.009 130.983,60.879 R23.2 130.983,63.927 131.318,64.262 U10.8 ; U10.7 U10.8 ; U5.3 U5.2 ; R29.1 140.797,59.263 142.667,61.133 R28.1 144.798,62.484 U11.7 ; U8.8 110.998,64.262 113.157,66.421 132.969,66.421 133.622,65.768 U10.8
  Bottom Layer w1: U7.7 U7.8 97.81,69.108 101.092,72.39 CY1.1 ; U6.14 116.586,83.439 112.268,87.757 112.268,106.426 114.173,108.331 DC1.3 144.018,108.331 144.78,107.569 144.78,105.41 P9.4@144.526,105.156
pads on no net: DC1.4 P8.3 P9.1 P9.3 P9.5 P9.6 P9.7 P9.8 U1.4 U2.1 U3.1 U4.1 U5.1 U7.1 U7.4 U8.1 U8.4 U9.1 U9.4 U10.1 U10.4 U11.1 U11.4

## Polygon pours and split planes (outlines as drawn)
GND on Bottom Layer "Bottom Layer-No Net" (solid, remove dead copper, shelved, pour order 1000): 50.292,113.411 173.863,113.411 173.863,25.4 170.561,25.4 50.292,25.4 50.292,113.411
GND on Bottom Layer "Bottom Layer-No Net" (solid, remove dead copper, shelved, pour order 1000): 50.292,113.284 50.419,113.411 173.863,113.411 173.863,25.4 50.292,25.4 50.292,113.284
GND on Bottom Layer "Bottom Layer-No Net" (solid, remove dead copper, pour order 1000): 50.292,113.411 173.736,113.411 173.736,25.4 172.593,25.4 50.292,25.4 50.292,113.411

## Other copper
Bottom Layer:
  pour cut-out: 110.49,106.68 113.792,109.982 159.639,109.982 166.751,102.87 166.751,82.55 138.811,82.55 137.922,81.661 137.922,69.596 137.795,69.596 133.096,64.897 113.157,64.897 113.157,104.013
  pour cut-out: 88.265,66.166 89.026,65.405 147.447,65.405 147.447,42.926 147.195,42.674 89.017,42.674 89.017,65.046 88.265,65.798
  pour cut-out: 86.233,56.261 145.669,56.261 148.082,53.848 148.082,25.654 148.59,25.146 148.463,25.019 76.454,25.019 76.454,57.15 76.327,57.277 79.883,60.833 79.883,61.341 88.138,61.341 88.265,61.214 86.233,59.182
  pour cut-out: 111.887,85.598 113.665,85.598 114.427,84.836 114.173,84.582 114.173,67.691 112.395,65.913 112.268,66.04 96.393,66.04 96.393,70.104

## Silkscreen, mask and mechanical layers (free items; w line width, h text height)
Top Overlay:
  lines w0.254: 50.292,25.4 173.792,25.4 173.792,113.4 50.292,113.4 50.292,25.4

## Dimensions
153.67,106.426 to 153.67,88.646 on Mechanical 13
152.4,105.156 to 152.4,89.916 on Mechanical 13
54.545,109.535 to 50.292,113.4 on Mechanical 1
54.545,109.535 to 52.451,113.538 on Mechanical 1
54.545,109.535 to 169.54,109.535 on Mechanical 1
54.545,109.535 to 54.545,29.535 on Mechanical 1

## Text inside footprints (layer, text, board x,y; h text height)
P11: Top Overlay "12" at 159.968,77.782 h1.27 r90; Top Overlay "1" at 162.508,78.798 h1.27 r90; Top Overlay "1" at 162.508,77.782 h1.27 r90; Top Overlay "1" at 162.508,60.51 h1.27 r90; Top Overlay "2" at 159.968,60.51 h1.27 r90